# Altium PCB Main.PcbDoc
Units mm, origin at the board's own origin, x right, y up, seen from the top; angles counter-clockwise.
Board outline 37 x 60 mm, 4 copper layers (Top Layer, Ground Layer, Power Layer, Bottom Layer), stack 1.591 mm thick; 39 components, 57 nets, 197 pads, 30 vias.
Unrouted connection lines stored in the file: 93.
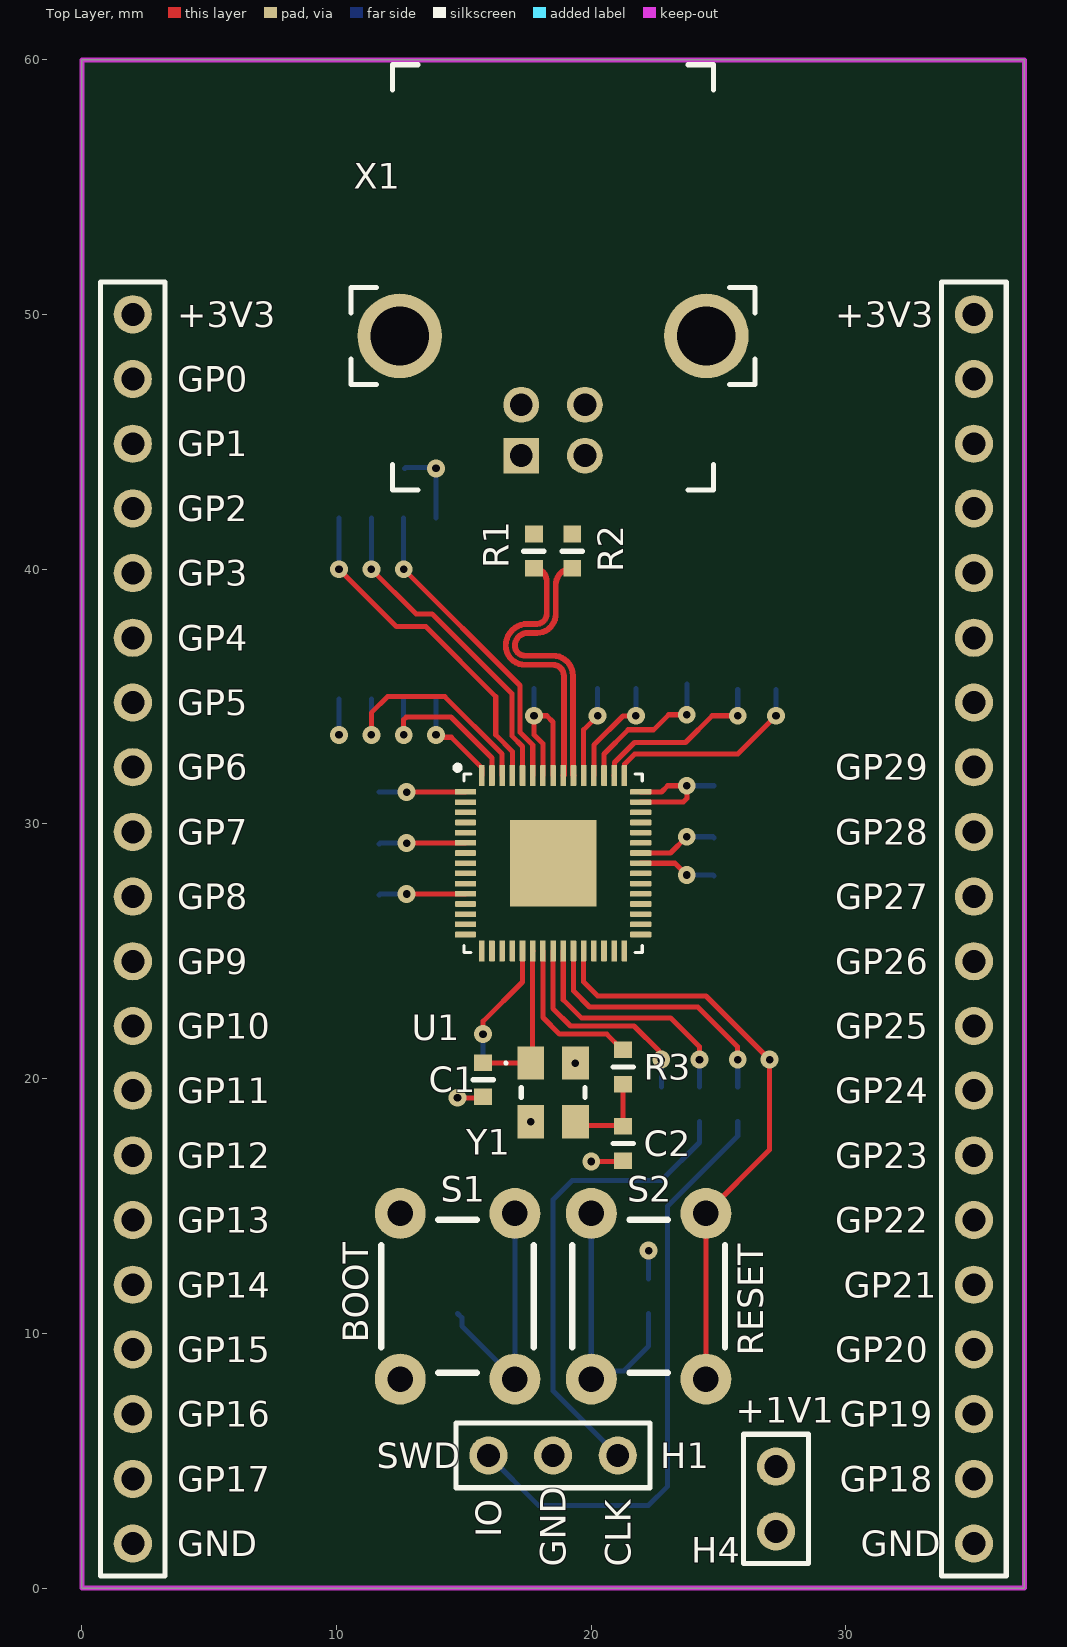
[diagram p0: Top Layer view]
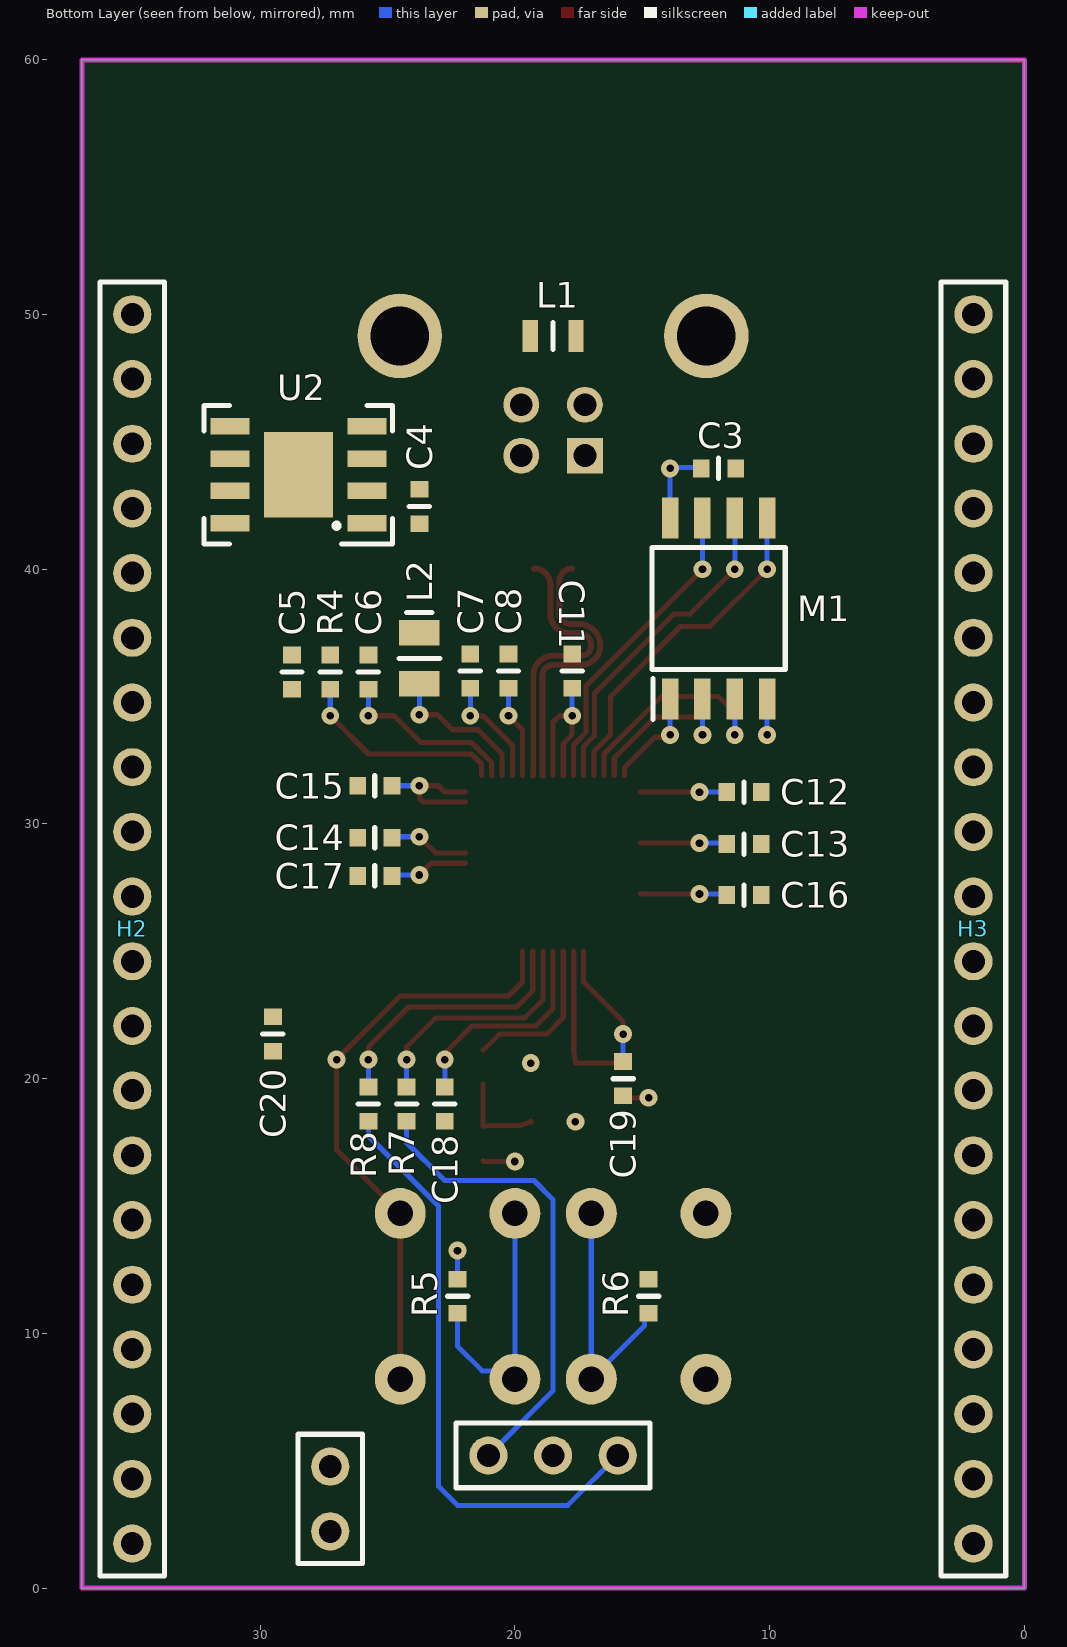
[diagram p1: Bottom Layer view, seen from below]

## Layer stack, top to bottom
Top Solder: solder mask 0.0102, Solder Resist, Dk 3.8
Top Layer: signal copper 0.035
Dielectric 2: prepreg 0.2104, 7628*1, Dk 4.4
Ground Layer: signal copper 0.0175
Dielectric 1: dielectric 1.065, FR-4, Dk 4.8
Power Layer: signal copper 0.0175
Dielectric 3: prepreg 0.2104, 7628*1, Dk 4.4
Bottom Layer: signal copper 0.035
Bottom Solder: solder mask 0.0102, Solder Resist, Dk 3.8

## Board outline
0,0 0,60 37,60 37,0

## Design rules (kind name [scope] priority, off if disabled: settings)
BoardOutlineClearance [All] p1: gap=0.2 ignorepadtopadclearanceinfootprint=FALSE
Clearance "inPolygon Clearance" [InPolygon] p1: gap=0.3 ignorepadtopadclearanceinfootprint=TRUE // this rule ensures that every net within a polygon of a different net has a set clearance from the poly
Clearance "Different Diff Pair" [All] p2: gap=0.2 ignorepadtopadclearanceinfootprint=TRUE
Clearance "Same Diff Pair" [All] p3: gap=0.1 ignorepadtopadclearanceinfootprint=TRUE
Clearance "Different Nets" [not InAnyDifferentialPair] p4: gap=0.3 ignorepadtopadclearanceinfootprint=TRUE except(0.1: Arc-SMDPad Arc-THPad Arc-Via Arc-Text Track-SMDPad Track-THPad Track-Via Track-Text SMDPad-Text THPad-Text Via-Text Fill-Text Poly-Text Region-Text Text-Text; 0.12: Arc-Arc Arc-Track Track-Track; 0.15: SMDPad-SMDPad SMDPad-THPad SMDPad-Via THPad-THPad THPad-Via Via-Via; 0.2: Arc-Hole Track-Hole SMDPad-Hole THPad-Hole Via-Hole Fill-Hole Poly-Hole Region-Hole Text-Hole)
Clearance "Same Net" [not InAnyDifferentialPair] p5: gap=0 ignorepadtopadclearanceinfootprint=TRUE except(0.1: THPad-Via; 0.18: Arc-Arc Arc-Track Track-Track)
ComponentClearance [All] p1: gap=0.102 collisioncheckmode=3 verticalgap=0.102 showdistances=TRUE
DiffPairsRouting "Ethernet Routing" [InDifferentialPairClass('Ethernet_Pairs')] p1: maxlimit=0.25 minlimit=0.2 mostfreqgap=0.25 toplayer_maxgap=0.2 toplayer_prefgap=0.2 toplayer_minwidth=0.25 toplayer_maxwidth=0.25 toplayer_prefwidth=0.25 midlayer1_mingap=0.25 midlayer1_minwidth=0.19 midlayer1_maxwidth=0.19 midlayer1_prefwidth=0.19 midlayer2_mingap=0.25 midlayer2_minwidth=0.19 midlayer2_maxwidth=0.19 midlayer2_prefwidth=0.19 bottomlayer_maxgap=0.2 bottomlayer_prefgap=0.2 bottomlayer_minwidth=0.25 bottomlayer_maxwidth=0.25 bottomlayer_prefwidth=0.25 impedanceprofiledriven=TRUE maxuncoupledlength=12.7
DiffPairsRouting "USB Routing" [InDifferentialPairClass('USB_Pairs')] p2: maxlimit=0.291 minlimit=0.127 mostfreqgap=0.291 toplayer_maxgap=0.127 toplayer_prefgap=0.127 toplayer_minwidth=0.23 toplayer_maxwidth=0.23 toplayer_prefwidth=0.23 midlayer1_mingap=0.291 midlayer1_minwidth=0.25 midlayer1_maxwidth=0.25 midlayer1_prefwidth=0.25 midlayer2_mingap=0.291 midlayer2_minwidth=0.25 midlayer2_maxwidth=0.25 midlayer2_prefwidth=0.25 bottomlayer_maxgap=0.127 bottomlayer_prefgap=0.127 bottomlayer_minwidth=0.23 bottomlayer_maxwidth=0.23 bottomlayer_prefwidth=0.23 impedanceprofiledriven=TRUE impedanceprofileid={F14BA31F-77FA-453E-8734-53F45B48A614} impedanceprofilevalue=90.000000 maxuncoupledlength=12.7
DiffPairsRouting "CAN Routing" [InDifferentialPairClass('CAN_Pairs')] p3: maxlimit=0.907 minlimit=0.5 mostfreqgap=0.907 toplayer_maxgap=0.5 toplayer_prefgap=0.5 toplayer_minwidth=0.201 toplayer_maxwidth=0.201 toplayer_prefwidth=0.201 midlayer1_mingap=0.907 midlayer1_minwidth=0.155 midlayer1_maxwidth=0.155 midlayer1_prefwidth=0.155 midlayer2_mingap=0.907 midlayer2_minwidth=0.155 midlayer2_maxwidth=0.155 midlayer2_prefwidth=0.155 bottomlayer_maxgap=0.5 bottomlayer_prefgap=0.5 bottomlayer_minwidth=0.201 bottomlayer_maxwidth=0.201 bottomlayer_prefwidth=0.201 impedanceprofiledriven=TRUE maxuncoupledlength=12.7
Height [All] p1: minheight=0 maxheight=1816.048 prefheight=12.7
HoleSize [All] p1: absolutevalues=TRUE maxlimit=6.3 minlimit=0.3 maxpercent=80.000 minpercent=20.000
HoleToHoleClearance [All] p1: gap=0.25 allowstackedmicrovias=FALSE
Length [All] p1: maxlimit=43.432 minlimit=0 usedelayunits=TRUE mindelay=0.000000 maxdelay=10000.000000
MatchedLengths "Diff Pair Matched Delays" [InDifferentialPairClass('Ethernet_Pairs') or InDifferentialPairClass('USB_Pairs') or InDifferentialPairClass('CAN_Pairs')] p1: tolerance=5 checknetsindiffpair=TRUE checkdiffpairvsdiffpair=FALSE checkxsignals=FALSE checkothers=FALSE usedelayunits=TRUE delaytolerance=100.000000
MinimumAnnularRing [All] p1: minimumring=0.2
MinimumSolderMaskSliver [All] p1: minsoldermaskwidth=0
PlaneClearance "Supply Net Clearance" [InNetClass('Supply_Nets')] p1: clearance=0.5
PlaneClearance "All Nets" [All] p2: clearance=0.3
PolygonConnect "Supply Nets" [InNetClass('Supply_Nets')] p1: connectstyle=Relief reliefconductorwidth=0.3 reliefentries=4 polygonreliefangle="90 Angle" conductorbypadedge=TRUE mindistance=0.381 enablemindistance=FALSE airgapwidth=0.254
PolygonConnect General [All] p2: connectstyle=Relief reliefconductorwidth=0.254 reliefentries=4 polygonreliefangle="90 Angle" airgapwidth=0.254
RoutingVias [All] p1: holewidth=0.2 width=0.35 viastyle="Through Hole" minholewidth=0.15 minwidth=0.3 maxholewidth=6.3 maxwidth=6.55
SilkToSilkClearance [All] p1: silktosilkclearance=0
SilkToSolderMaskClearance [All] p1: minsilkscreentomaskgap=0 clearancetoexposedcopper=TRUE
SolderMaskExpansion [All] p1: expansion=0.075 istentingtop=FALSE
SupplyNets "Schematic Supply Nets_3" [InNet('GND')] p1: voltage=0.000
SupplyNets "Schematic Supply Nets_8" [InNet('RUN')] p2: voltage=0.000
SupplyNets "Schematic Supply Nets_6" [InNet('XOUT')] p3: voltage=0.000
SupplyNets "Schematic Supply Nets_4" [InNet('+1V1')] p4: voltage=0.000
SupplyNets "Schematic Supply Nets_2" [InNet('+5V')] p5: voltage=0.000
SupplyNets "Schematic Supply Nets" [InNet('XIN')] p6: voltage=0.000
SupplyNets "Schematic Supply Nets_7" [InNet('+3V3')] p7: voltage=0.000
SupplyNets "Schematic Supply Nets_1" [InNet('Earth')] p8: voltage=0.000
UnRoutedNet [All] p1: checkbadconnections=TRUE
Width "nRF Width" [InNetClass('nRF Signal')] p1: maxlimit=0.379 minlimit=0.263 preferedwidth=0.379 toplayer_minwidth=0.379 midlayer1_maxwidth=0.263 midlayer1_prefwidth=0.263 midlayer2_maxwidth=0.263 midlayer2_prefwidth=0.263 bottomlayer_minwidth=0.379 impedanceprofiledriven=TRUE minimp=50.000000 maximp=50.000000 favimp=50.000000 checkconnectedcopper=TRUE
Width [All] p2: maxlimit=100 minlimit=0.1 preferedwidth=0.3
20 further rules are at their usual default settings.

## Classes and differential pairs
differential pair class USB_Pairs: RP2350_D RP2350_DX
net class Supply_Nets: +3V3 +5V Earth GND
component class RP2350A: C1 C2 C3 C5 C6 C7 C8 C11 C12 C13 C14 C15 C16 C17 C18 C19 C20 H4 L2 M1 R1 R2 R3 R4 R5 R6 S1 S2 U1 X1 Y1
component class Power: C4 L1 U2
component class "Pin Connections": H1 H2 H3 R7 R8
differential pair RP2350_DX: +RP2350_DX_P -RP2350_DX_N
differential pair RP2350_D: +RP2350_D_P -RP2350_D_N

## Components (designator, comment, footprint, x,y, rotation, side; value= is the part's Value field where it differs from the comment)
C1 "[Cap] 0603 15pF 1% 100V" "[Cap] SMD 0603" 15.75,19.96 r90 top
C2 "[Cap] 0603 15pF 1% 100V" "[Cap] SMD 0603" 21.25,17.46 r90 top
C3 "[Cap] 0603 0.1uF 10% 16V" "[Cap] SMD 0603" 12,43.96 r0 bottom
C4 "[Cap] 0603 10uF 10% 10V" "[Cap] SMD 0603" 23.75,42.46 r90 bottom
C5 "[Cap] 0603 4.7uF 10% 25V" "[Cap] SMD 0603" 28.75,35.96 r90 bottom
C6 "[Cap] 0603 4.7uF 10% 25V" "[Cap] SMD 0603" 25.75,35.96 r90 bottom
C7 "[Cap] 0603 0.1uF 10% 16V" "[Cap] SMD 0603" 21.75,36 r270 bottom
C8 "[Cap] 0603 4.7uF 10% 25V" "[Cap] SMD 0603" 20.25,36 r90 bottom
C11 "[Cap] 0603 0.1uF 10% 16V" "[Cap] SMD 0603" 17.75,36 r270 bottom
C12 "[Cap] 0603 0.1uF 10% 16V" "[Cap] SMD 0603" 11,31.25 r0 bottom
C13 "[Cap] 0603 0.1uF 10% 16V" "[Cap] SMD 0603" 11,29.21 r0 bottom
C14 "[Cap] 0603 4.7uF 10% 25V" "[Cap] SMD 0603" 25.5,29.46 r180 bottom
C15 "[Cap] 0603 0.1uF 10% 16V" "[Cap] SMD 0603" 25.5,31.5 r180 bottom
C16 "[Cap] 0603 0.1uF 10% 16V" "[Cap] SMD 0603" 11,27.21 r0 bottom
C17 "[Cap] 0603 0.1uF 10% 16V" "[Cap] SMD 0603" 25.5,27.96 r180 bottom
C18 "[Cap] 0603 0.1uF 10% 16V" "[Cap] SMD 0603" 22.75,19 r90 bottom
C19 "[Cap] 0603 0.1uF 10% 16V" "[Cap] SMD 0603" 15.75,20 r90 bottom
C20 "[Cap] 0603 0.1uF 10% 16V" "[Cap] SMD 0603" 29.5,21.75 r90 bottom
H1 "1x3 Header" "[Header] 1x3 Male" 18.5,5.21 r180 top
H2 "1x20 Header" "[Header] 1x20 Male" 35.02,25.88 r270 bottom
H3 "1x20 Header" "[Header] 1x20 Male" 2,25.88 r270 bottom
H4 "1x2 Header" "[Header] 1x2 Male" 27.25,3.5 r270 top
L1 "652-MH2029-300Y" "[Ferrite] SMD 0805" 18.5,49.16 r180 bottom
L2 "[3.3uH] SMD 0806 2.1A" "[Inductor] SMD 0806" 23.75,36.5 r270 bottom
M1 "W25Q128JVSIM" "[Flash] 128MBit" 12,38.46 r90 bottom
R1 "[27] SMD 0603 1% 1/10W" "[Res] SMD 0603" 17.75,40.71 r270 top
R2 "[27] SMD 0603 1% 1/10W" "[Res] SMD 0603" 19.25,40.71 r270 top
R3 "[1k] SMD 0603 1% 1/10W" "[Res] SMD 0603" 21.25,20.46 r90 top
R4 "[33] SMD 0603 0.5% 1/16W" "[Res] SMD 0603" 27.25,35.96 r270 bottom
R5 "[1k] SMD 0603 1% 1/10W" "[Res] SMD 0603" 22.25,11.46 r270 bottom
R6 "[1k] SMD 0603 1% 1/10W" "[Res] SMD 0603" 14.75,11.46 r270 bottom
R7 "[100] SMD 0603 1% 1/10W" "[Res] SMD 0603" 24.25,19 r90 bottom
R8 "[100] SMD 0603 1% 1/10W" "[Res] SMD 0603" 25.75,19 r90 bottom
S1 "Standard pushbutton" "[SPST] Pushbutton" 14.75,11.46 r270 top
S2 "Standard pushbutton" "[SPST] Pushbutton" 22.25,11.46 r270 top
U1 "RP2350A" "[MCU] RP2350A" 18.5,28.46 r0 top
U2 "3V3 1.5A" "[Linear] 3V3 1.5A" 28.5,43.71 r0 bottom
X1 "USB-B" "[USB] Type-B" 18.5,44.46 r180 top
Y1 "XTAL 12MHz" "[Crystal] SMD 12MHz" 18.5,19.46 r270 top

## Footprints (in the part's own frame and the unit in brackets; to place one, negate y for a bottom-side part, rotate by r counter-clockwise, add the part's x,y. Pads: shape width x height; smd on the part's side, far side on the other; paste and mask are expansions set on the pad)
"[Cap] SMD 0603" [mm]
  rect 0.65x0.7 smd: 1(-0.675,0) 2(0.675,0)
  silkscreen extent 0,-0.4 0,0.4, body extent -0.8,-0.45 0.8,0.45, height 0.8
"[Crystal] SMD 12MHz" [mm]
  rect 1.3x1.05 smd: 1(-1.15,-0.875) 2(1.15,-0.875) 3(1.15,0.875) 4(-1.15,0.875)
  silkscreen extent -1.2,-1.9 0.2,1.25, body extent -1.6,-1.25 1.6,1.25, height 0.75
"[Ferrite] SMD 0805" [mm]
  rect 0.6x1.25 smd: 1(-0.9,0) 2(0.9,0)
  silkscreen extent 0,-0.53 0,0.53, body extent -1,-0.6 1,0.6, height 1.1
"[Flash] 128MBit" [mm] "W25Q128JVSIM"
  rect 1.6x0.65 smd: 1(-3.55,1.905) 2(-3.55,0.635) 3(-3.55,-0.635) 4(-3.55,-1.905) 5(3.55,-1.905) 6(3.55,-0.635) 7(3.55,0.635) 8(3.55,1.905)
  silkscreen extent -4.35,-2.61 2.4,2.62, body extent -3.9,-2.61 3.9,2.62, height 1.95
"[Header] 1x2 Male" [mm]
  round 1.5 hole 0.9: 1(-1.27,0) 2(1.27,0)
  silkscreen extent -2.54,-1.27 2.54,1.27, body extent -2.54,-1.27 2.54,1.27, height 9.5
"[Header] 1x3 Male" [mm]
  round 1.5 hole 0.9: 1(-2.54,0) 2(0,0) 3(2.54,0)
  silkscreen extent -3.81,-1.27 3.81,1.27, body extent -3.81,-1.27 3.81,1.27, height 9.5
"[Header] 1x20 Male" [mm]
  round 1.5 hole 0.9: 1(-24.13,0) 2(-21.59,0) 3(-19.05,0) 4(-16.51,0) 5(-13.97,0) 6(-11.43,0) 7(-8.89,0) 8(-6.35,0) 9(-3.81,0) 10(-1.27,0) 11(1.27,0) 12(3.81,0) 13(6.35,0) 14(8.89,0) 15(11.43,0) 16(13.97,0) 17(16.51,0) 18(19.05,0) 19(21.59,0) 20(24.13,-0.001)
  silkscreen extent -25.4,-1.27 25.4,1.27, body extent -25.4,-1.27 25.4,1.27, height 9.5
"[Inductor] SMD 0806" [mm]
  rect 1x1.6 smd: 1(-1,0) 2(1,0)
  silkscreen extent -1.8,-0.8 0,0.8, body extent -1,-0.8 1,0.8, height 1
"[Linear] 3V3 1.5A" [mm]
  rect 1.525x0.65 smd: 1(-2.688,1.905) 2(-2.688,0.635) 3(-2.688,-0.635) 4(-2.688,-1.905) 5(2.688,-1.905) 6(2.688,-0.635) 7(2.688,0.635) 8(2.688,1.905)
  rect 2.71x3.35 smd: 9(0,0)
  silkscreen extent -3.7,-2.73 3.7,2.73, body extent -3,-2.45 3,2.45, height 1.5
"[MCU] RP2350A" [mm]
  rrect25% 0.83x0.22 smd: 1(-3.44,2.8) 2(-3.44,2.4) 3(-3.44,2) 4(-3.44,1.6) 5(-3.44,1.2) 6(-3.44,0.8) 7(-3.44,0.4) 8(-3.44,0) 9(-3.44,-0.4) 10(-3.44,-0.8) 11(-3.44,-1.2) 12(-3.44,-1.6) 13(-3.44,-2) 14(-3.44,-2.4) 15(-3.44,-2.8) 31(3.44,-2.8) 32(3.44,-2.4) 33(3.44,-2) 34(3.44,-1.6) 35(3.44,-1.2) 36(3.44,-0.8) 37(3.44,-0.4) 38(3.44,0) 39(3.44,0.4) 40(3.44,0.8) 41(3.44,1.2) 42(3.44,1.6) 43(3.44,2) 44(3.44,2.4) 45(3.44,2.8)
  rrect25% 0.22x0.83 smd: 16(-2.8,-3.44) 17(-2.4,-3.44) 18(-2,-3.44) 19(-1.6,-3.44) 20(-1.2,-3.44) 21(-0.8,-3.44) 22(-0.4,-3.44) 23(0,-3.44) 24(0.4,-3.44) 25(0.8,-3.44) 26(1.2,-3.44) 27(1.6,-3.44) 28(2,-3.44) 29(2.4,-3.44) 30(2.8,-3.44) 46(2.8,3.44) 47(2.4,3.44) 48(2,3.44) 49(1.6,3.44) 50(1.2,3.44) 51(0.8,3.44) 52(0.4,3.44) 53(0,3.44) 54(-0.4,3.44) 55(-0.8,3.44) 56(-1.2,3.44) 57(-1.6,3.44) 58(-2,3.44) 59(-2.4,3.44) 60(-2.8,3.44)
  rect 3.4x3.4 smd paste-4: 61(0,0)
  silkscreen extent -3.85,-3.5 3.5,3.85, body extent -3.55,-3.55 3.55,3.55, height 0.96
"[Res] SMD 0603" [mm]
  rect 0.65x0.7 smd: 1(-0.675,0) 2(0.675,0)
  silkscreen extent 0,-0.4 0,0.4, body extent -0.8,-0.45 0.8,0.45, height 0.8
"[SPST] Pushbutton" [mm] "(Regular pushbutton)"
  round 2 hole 1: 1(-3.25,2.25) 1(3.25,2.25) 2(-3.25,-2.25) 2(3.25,-2.25)
  silkscreen extent -3,-3 3,3, body extent -3.85,-3 3.85,3, height 4.95
"[USB] Type-B" [mm] "USB-B-S-F-B-TH"
  rect 1.408x1.408 hole 0.9: 1(1.25,0)
  round 1.408 hole 0.9: 2(-1.25,0) 3(-1.25,-2) 4(1.25,-2)
  round 3.316 hole 2.3: MH(-6.02,-4.7) MH(6.02,-4.7)
  silkscreen extent -7.93,-15.35 7.93,1.35, body extent -7.25,-15.1 7.25,1.4, height 10.7

## Part data
C1 C2: "GCM1885C2A150FA16D", Capacitance=15pF, Max Voltage=100V, Size Package=0603, Supplier Part Number 1=490-16416-1-ND, Tolerance=1%, Supplier 1=DigiKey
C3 C7 C11 C12 C13 C15 C16 C17 C18 C19 C20: "CC0603KRX7R7BB104", Capacitance=100nF, Max Voltage=16V, Size Package=0603, Supplier Part Number 1=311-1088-6-ND, Tolerance=10%, Supplier 1=DigiKey
C4: "CL10A106KP8NNNC", Capacitance=10uF, Max Voltage=10V, Size Package=0603, Supplier Part Number 1=1276-1192-6-ND, Tolerance=10%, Supplier 1=DigiKey
C5 C6 C8 C14: "GRM188R61E475KE11D", Capacitance=4.7uF, Max Voltage=25V, Size Package=0603, Supplier Part Number 1=490-7203-6-ND, Tolerance=10%, Supplier 1=DigiKey
H1: library part "[Header] 1x3 Male", "2.54mm pitch"
H2 H3: library part "[Header] 1x20 Male", "2.54mm pitch"
H4: library part "[Header] 1x2 Male", "2.54mm pitch"
L1: library part "[Ferrite] SMD 0805 3A 30ohm", Res @ Freq="30 @ 100MHz", Size Package=0805, Supplier Part Number 1=MH2029-300YCT-ND, Supplier 1=DigiKey
L2: "AOTA-B201610S3R3-101-T", Inductance=3.3uH, Package=0806, Supplier Part Number 1=535-AOTA-B201610S3R3-101-TCT-ND, Supplier 1=DigiKey
M1: library part "[Flash] 128MBit", Supplier Part Number 1=W25Q128JVSIM-ND, Supplier 1=DigiKey
R1 R2: "MCT06030C2709FP500", Resistance=27, Size Package=0603, Supplier Part Number 1=749-1631-1-ND, Tolerance=1%, Supplier 1=DigiKey, Wattage=1/10W
R3 R5 R6: "RMCF0603FT1K00", Resistance=1k, Size Package=0603, Supplier Part Number 1=RMCF0603FT1K00DKR-ND, Tolerance=1%, Supplier 1=DigiKey, Wattage=1/10W
R4: "RR0816Q-330-D", Resistance=33, Size Package=0603, Supplier Part Number 1=RR08Q33DDKR-ND, Tolerance=0.5%, Supplier 1=DigiKey, Wattage=1/16W
R7 R8: "RC0603FR-07100RL", Resistance=100, Size Package=0603, Supplier Part Number 1=311-100HRDKR-ND, Tolerance=1%, Supplier 1=DigiKey, Wattage=1/10W
S1 S2: library part "[SPST] Pushbutton", Supplier Part Number 1=450-1650-ND, Supplier 1=DigiKey
U1: library part "[MCU] RP2350A", "QFN-60 Package", Supplier Part Number 1=2648-SC1509-A4CT-ND, Supplier 1=DigiKey
U2: library part "[Linear] 3V3 1.5A", "AP7362A-33SP-13", Supplier Part Number 1=AP7362A-33SP-13DICT-ND, Supplier 1=DigiKey
X1: library part "[USB] Type-B", "USB-B-S-F-B-TH", Supplier Part Number 1=SAM10867-ND, Supplier 1=DigiKey
Y1: library part "[Crystal] SMD 12MHz", "815-ABM8-272-T3", Supplier Part Number 1=535-ABM8-272-T3CT-ND, Supplier 1=DigiKey

## Via types
v1: diameter 0.7, hole 0.3, Top Layer to Bottom Layer, 30 vias

## Nets (pads, with @x,y where several pads share a name; then routed paths per layer and width w, separated by ;. In a path a pad name is that pad's centre, name@x,y a point inside that pad or via, vN(x,y) a via of type N, cw(c..) or ccw(c..) an arc to the next point about the centre after c; other vN are vias at no path point)
+1V1: C8.1 C13.2 C14.2 C18.2 H4.1 L2.1 U1.6 U1.23 U1.39 U1.50 | length 18.8
  Top Layer w0.2: v1(12.75,29.25) 12.755,29.255 15.055,29.255 U1.6 ; U1.23 18.5,22.75 19.18,22.07 21.68,22.07 22.654,21.096 22.654,20.846 v1(22.75,20.75) ; U1.50 19.7,33.7 v1(20.25,34.25) ; U1.39 23.11,28.86 v1(23.75,29.5) v1@23.615,29.5
  Bottom Layer w0.2: C13.2 11.715,29.25 v1(12.75,29.25) ; v1(20.25,34.25) C8.1 ; C18.2 v1@22.75,20.631 ; v1(23.75,29.5) 24.785,29.5 C14.2
+3V3: C3.2 C5.1 C6.2 C7.2 C11.2 C12.2 C15.2 C16.2 C17.2 C19.2 C20.2 H2.1 H3.1 M1.8 R4.1 U1.1 U1.11 U1.20 U1.30 U1.38 U1.44 U1.45 U1.49 U1.53 U1.54 U2.5 U2.6 U2.7 | length 34.3
  Top Layer w0.2: v1(12.75,27.25) 12.755,27.255 15.055,27.255 U1.11 ; v1(12.75,31.25) 12.755,31.255 15.055,31.255 U1.1 ; v1(15.75,21.75) 15.755,21.755 15.755,22.255 17.3,23.8 U1.20 ; U1.54 18.1,33.15 17.75,33.5 v1(17.75,34.25) 18.25,34.25 18.5,34 U1.53 ; U1.49 20.1,33.1 21.245,34.245 21.745,34.245 v1(21.75,34.25) ; U1.38 23.29,28.46 v1(23.75,28) ; U1.44 23.61,30.86 23.75,31 v1(23.75,31.5) 23,31.5 22.76,31.26 U1.45
  Bottom Layer w0.2: C16.2 11.715,27.25 v1(12.75,27.25) ; C12.2 v1(12.75,31.25) ; C3.2 12.715,44 v1@13.905,44 ; M1.8 v1(13.905,43.96) ; C19.2 v1(15.75,21.75) ; v1(17.75,34.25) C11.2 ; v1(21.75,34.25) C7.2 ; v1(23.75,28) 24.785,28 C17.2 ; v1(23.75,31.5) C15.2
+5V: C4.2 U2.2 U2.3 U2.4 X1.1
Earth: L1.1 X1.MH
GND: C1.1 C2.1 C3.1 C4.1 C5.2 C6.1 C7.1 C8.2 C11.1 C12.1 C13.1 C14.1 C15.1 C16.1 C17.1 C18.1 C19.1 C20.1 H1.2 H2.20 H3.20 H4.2 L1.2 M1.4 R5.1 S1.2 U1.47 U1.61 U2.1 U2.9 X1.4 Y1.2 Y1.4 | length 12
  Top Layer w0.2: v1(14.75,19.25) 15.715,19.25 C1.1 ; v1(20,16.75) 21.215,16.75 C2.1 ; U1.47 20.91,31.91 20.91,32.41 21.7,33.2 23.7,33.2 24.75,34.25 v1(25.75,34.25)
  Bottom Layer w0.2: v1(10.095,33.5) M1.4 ; R5.1 v1(22.25,13.25) ; v1(25.75,34.25) C6.1
  other v1: 17.625,18.31 19.375,20.61
GP0: H3.2 U1.2
GP1: H3.3 U1.3
GP2: H3.4 U1.4
GP3: H3.5 U1.5
GP4: H3.6 U1.7
GP5: H3.7 U1.8
GP6: H3.8 U1.9
GP7: H3.9 U1.10
GP8: H3.10 U1.12
GP9: H3.11 U1.13
GP10: H3.12 U1.14
GP11: H3.13 U1.15
GP12: H3.14 U1.16
GP13: H3.15 U1.17
GP14: H3.16 U1.18
GP15: H3.17 U1.19
GP16: H3.18 U1.27
GP17: H3.19 U1.28
GP18: H2.19 U1.29
GP19: H2.18 U1.31
GP20: H2.17 U1.32
GP21: H2.16 U1.33
GP22: H2.15 U1.34
GP23: H2.14 U1.35
GP24: H2.13 U1.36
GP25: H2.12 U1.37
GP26: H2.11 U1.40
GP27: H2.10 U1.41
GP28: H2.9 U1.42
GP29: H2.8 U1.43
NetC2_2: C2.2 R3.1 Y1.3 | length 3.6
  Top Layer w0.2: Y1.3 19.8,18.158 21,18.158 C2.2 R3.1
NetH1_1: H1.1 R7.1 | length 18.6
  Bottom Layer w0.2: H1.1 18.5,7.75 18.5,15.25 19.25,16 22.75,16 24.25,17.5 R7.1
NetH1_3: H1.3 R8.1 | length 23.6
  Bottom Layer w0.2: H1.3 17.92,3.25 22.25,3.25 23,4 23,15 25.75,17.75 R8.1
NetR5_2: R5.2 S2.2 | length 10.6
  Bottom Layer w0.2: S2.2@20,14.71 20,8.21 20.32,8.53 21.28,8.53 22.25,9.5 R5.2
QSPI_SCLK: M1.6 U1.56 | length 12.9
  Top Layer w0.2: v1(11.365,40) 13.115,38.25 13.75,38.25 16.88,35.12 16.88,33.465 17.3,33.045 U1.56
  Bottom Layer w0.2: v1(11.365,40) M1.6
QSPI_SD0: M1.5 U1.57 | length 13.6
  Top Layer w0.2: v1(10.095,40) 12.345,37.75 13.5,37.75 16.25,35 16.25,33.5 16.9,32.85 U1.57
  Bottom Layer w0.2: v1(10.095,40) M1.5
QSPI_SD1: M1.2 U1.59 | length 6.9
  Top Layer w0.2: v1(12.635,33.5) 12.635,34.094 12.746,34.205 14.49,34.205 16.1,32.595 U1.59
  Bottom Layer w0.2: v1(12.635,33.5) M1.2
QSPI_SD2: M1.3 U1.58 | length 9.5
  Top Layer w0.2: v1(11.365,33.5) 11.365,34.365 12,35 14.25,35 16.5,32.75 U1.58
  Bottom Layer w0.2: v1(11.365,33.5) M1.3
QSPI_SD3: M1.7 U1.55 | length 12.2
  Top Layer w0.2: v1(12.635,40) 17.2,35.435 17.2,33.597 17.7,33.097 U1.55
  Bottom Layer w0.2: v1(12.635,40) M1.7
QSPI_SS: M1.1 R6.1 U1.60 | length 4
  Top Layer w0.2: v1(13.905,33.5) 14.001,33.404 14.501,33.404 15.7,32.205 U1.60
  Bottom Layer w0.2: v1(13.905,33.5) M1.1
RP2350_D_N: R2.1 X1.2
RP2350_D_P: R1.1 X1.3
RP2350_DX_N: R2.2 U1.51 | length 11.4
  Top Layer w0.23: R2.2 ccw(c19.25,39.392) 18.607,39.392 18.607,38.25 cw(c17.857,38.25) 17.857,37.5 17.5,37.5 ccw(c17.5,37) 17,37 ccw(c17.393,37) 17.393,36.607 18.5,36.607 cw(c18.5,35.829) 19.279,35.829 19.279,31.921 ccw(c19.3,31.921) U1.51
RP2350_DX_P: R1.2 U1.52 | length 11.3
  Top Layer w0.23: R1.2 cw(c17.75,39.535) 18.25,39.535 18.25,38.25 cw(c17.857,38.25) 17.857,37.857 17.5,37.857 ccw(c17.5,37) 16.643,37 ccw(c17.393,37) 17.393,36.25 18.5,36.25 cw(c18.5,35.829) 18.921,35.829 18.921,31.921 cw(c18.9,31.921) U1.52
RUN: S2.1 U1.26 | length 23.4
  Top Layer w0.2: U1.26 19.7,23.8 20.25,23.25 24.5,23.25 v1(27,20.75) 27,17.21 24.5,14.71 S2.1@24.5,8.21
SWCLK: R7.2 U1.24 | length 9.6
  Top Layer w0.2: U1.24 18.9,23.1 19.61,22.39 23.11,22.39 24.245,21.255 24.245,20.755 v1(24.25,20.75)
  Bottom Layer w0.2: R7.2 v1(24.25,20.75)
SWDIO: R8.2 U1.25 | length 10.5
  Top Layer w0.2: U1.25 19.3,23.45 19.93,22.82 24.18,22.82 25.745,21.255 25.745,20.755 v1(25.75,20.75)
  Bottom Layer w0.2: R8.2 v1(25.75,20.75)
U\S\B\_\B\O\O\T\: R6.2 S1.1 | length 10
  Bottom Layer w0.2: R6.2 14.919,10.616 14.919,10.291 17,8.21 S1.1@17,14.71
VREG_AVDD: R4.2 U1.46 | length 8.2
  Top Layer w0.2: U1.46 21.31,31.91 21.31,32.357 21.703,32.75 25.75,32.75 v1(27.25,34.25)
  Bottom Layer w0.2: v1(27.25,34.25) R4.2
VREG_LX: L2.2 U1.48 | length 5.9
  Top Layer w0.2: U1.48 20.5,32.75 21.45,33.7 22.45,33.7 23.04,34.29 v1(23.75,34.29)
  Bottom Layer w0.2: v1(23.75,34.29) L2.2
XIN: C1.2 U1.21 Y1.1 | length 6.5
  Top Layer w0.2: C1.2 16,20.616 17.2,20.616 Y1.1 17.69,21.16 U1.21@17.69,24.705 ; U1.21@17.69,24.96 U1.21@17.69,24.705 ; U1.21 U1.21@17.69,24.705
XOUT: R3.2 U1.22 | length 6.3
  Top Layer w0.2: U1.22 18.1,22.4 18.75,21.75 20.61,21.75 21.225,21.135 R3.2
pads on no net: H2.2 H2.3 H2.4 H2.5 H2.6 H2.7 U2.8

## Keep-outs
Keep-Out Layer:
  the board outline again, w0.2

## Silkscreen, mask and mechanical layers (free items; w line width, h text height)
Top Overlay:
  text "+3V3" at 3.75,49.51 h1
  text "+3V3" at 29.584,49.51 h1
  text "GP0" at 3.75,46.97 h1
  text "GP1" at 3.75,44.43 h1
  text "GP2" at 3.75,41.89 h1
  text "GP3" at 3.75,39.35 h1
  text "GP4" at 3.75,36.81 h1
  text "GP5" at 3.75,34.27 h1
  text "GP6" at 3.75,31.73 h1
  text "GP29" at 29.584,31.73 h1
  text "GP7" at 3.75,29.19 h1
  text "GP28" at 29.584,29.19 h1
  text "GP8" at 3.75,26.65 h1
  text "GP27" at 29.584,26.65 h1
  text "GP9" at 3.75,24.11 h1
  text "GP26" at 29.584,24.11 h1
  text "GP10" at 3.75,21.57 h1
  text "GP25" at 29.584,21.57 h1
  text "GP11" at 3.75,19.03 h1
  text "GP24" at 29.584,19.03 h1
  text "GP12" at 3.75,16.49 h1
  text "GP23" at 29.584,16.49 h1
  text "GP13" at 3.75,13.95 h1
  text "GP22" at 29.584,13.95 h1
  text "GP14" at 3.75,11.41 h1
  text "GP21" at 29.917,11.41 h1
  text "BOOT" at 11.25,9.627 h1 r90
  text "RESET" at 26.75,9.127 h1 r90
  text "GP15" at 3.75,8.87 h1
  text "GP20" at 29.584,8.87 h1
  text "+1V1" at 25.667,6.5 h1
  text "GP16" at 3.75,6.33 h1
  text "GP19" at 29.751,6.33 h1
  text "SWD" at 11.584,4.71 h1
  text "GP17" at 3.75,3.79 h1
  text "GP18" at 29.751,3.79 h1
  text "IO" at 16.46,2 h1 r90
  text "GND" at 3.75,1.25 h1
  text "GND" at 30.584,1.25 h1
  text "GND" at 19,0.834 h1 r90
  text "CLK" at 21.54,0.834 h1 r90